# Altium PCB MOCO控制器V1.PcbDoc (part 1 of 2)
Units mm, origin at the board's own origin, x right, y up, seen from the top; angles counter-clockwise.
Board outline 43.94 x 28.83 mm, 4 copper layers (Top Layer, Mid-Layer 1, Mid-Layer 2, Bottom Layer); 67 components, 72 nets, 283 pads, 90 vias.
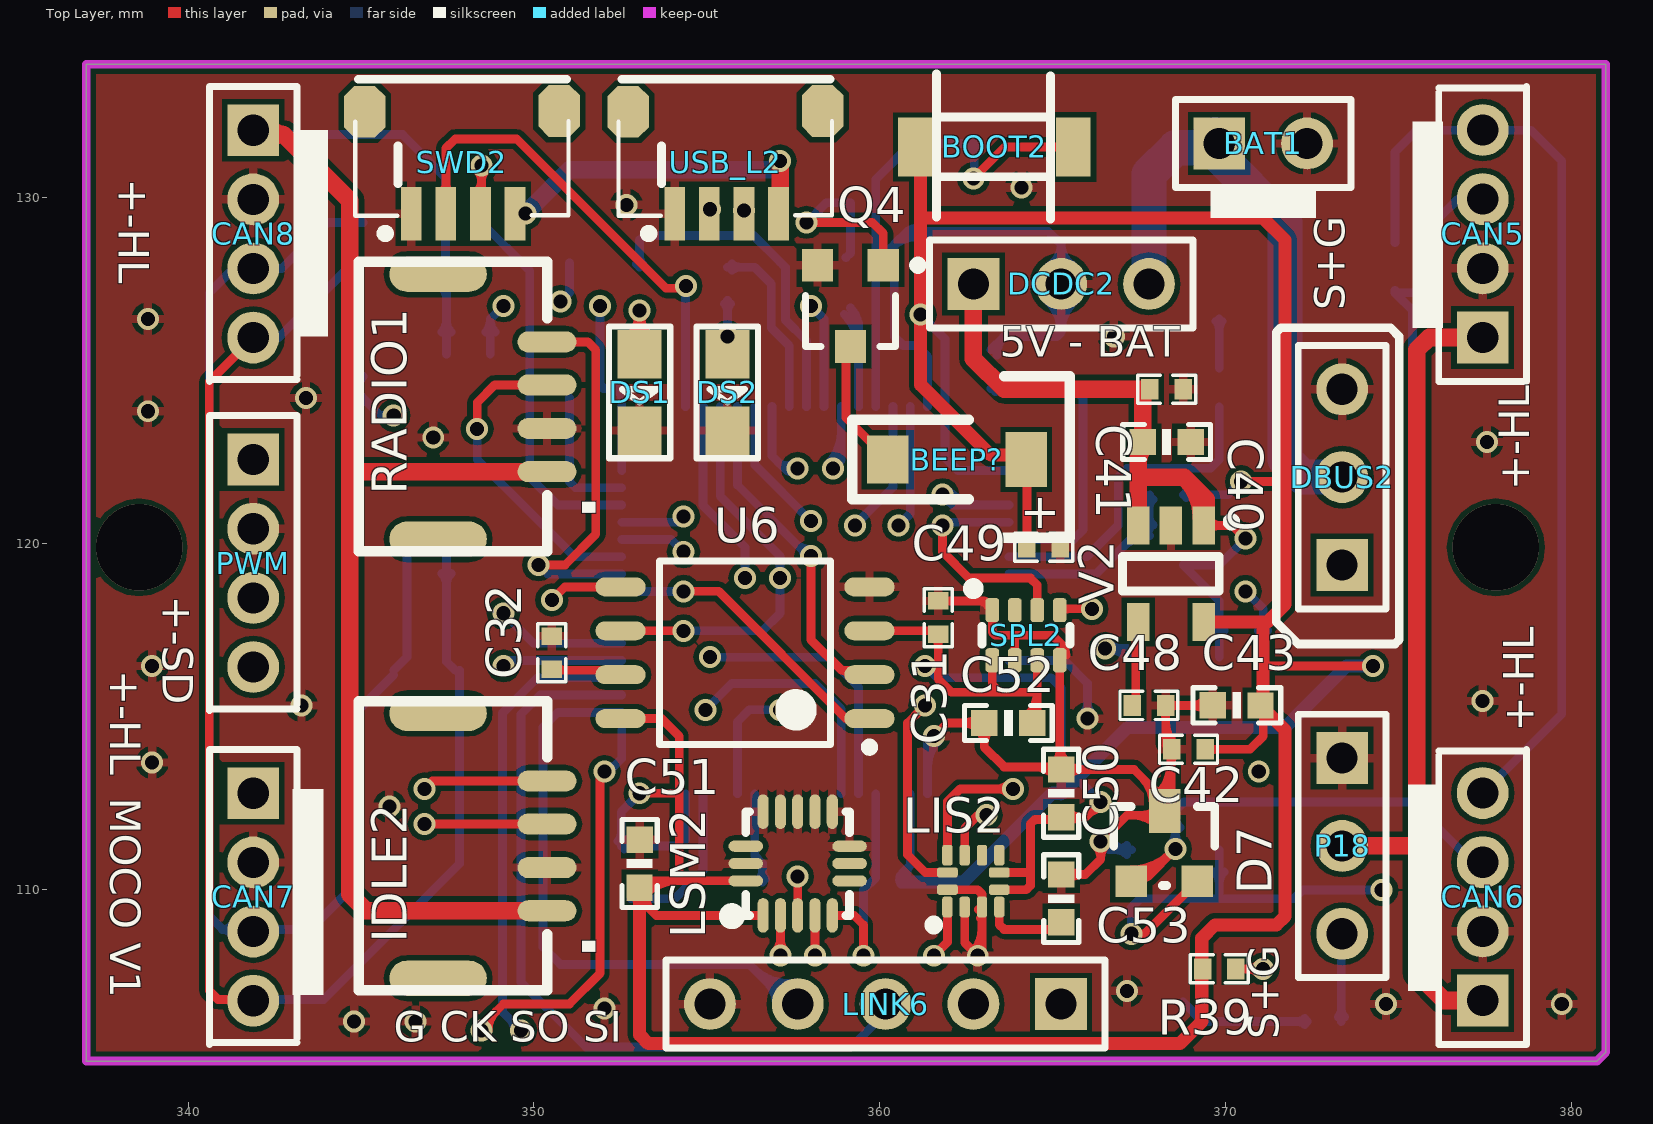
[diagram p0: Top Layer view]
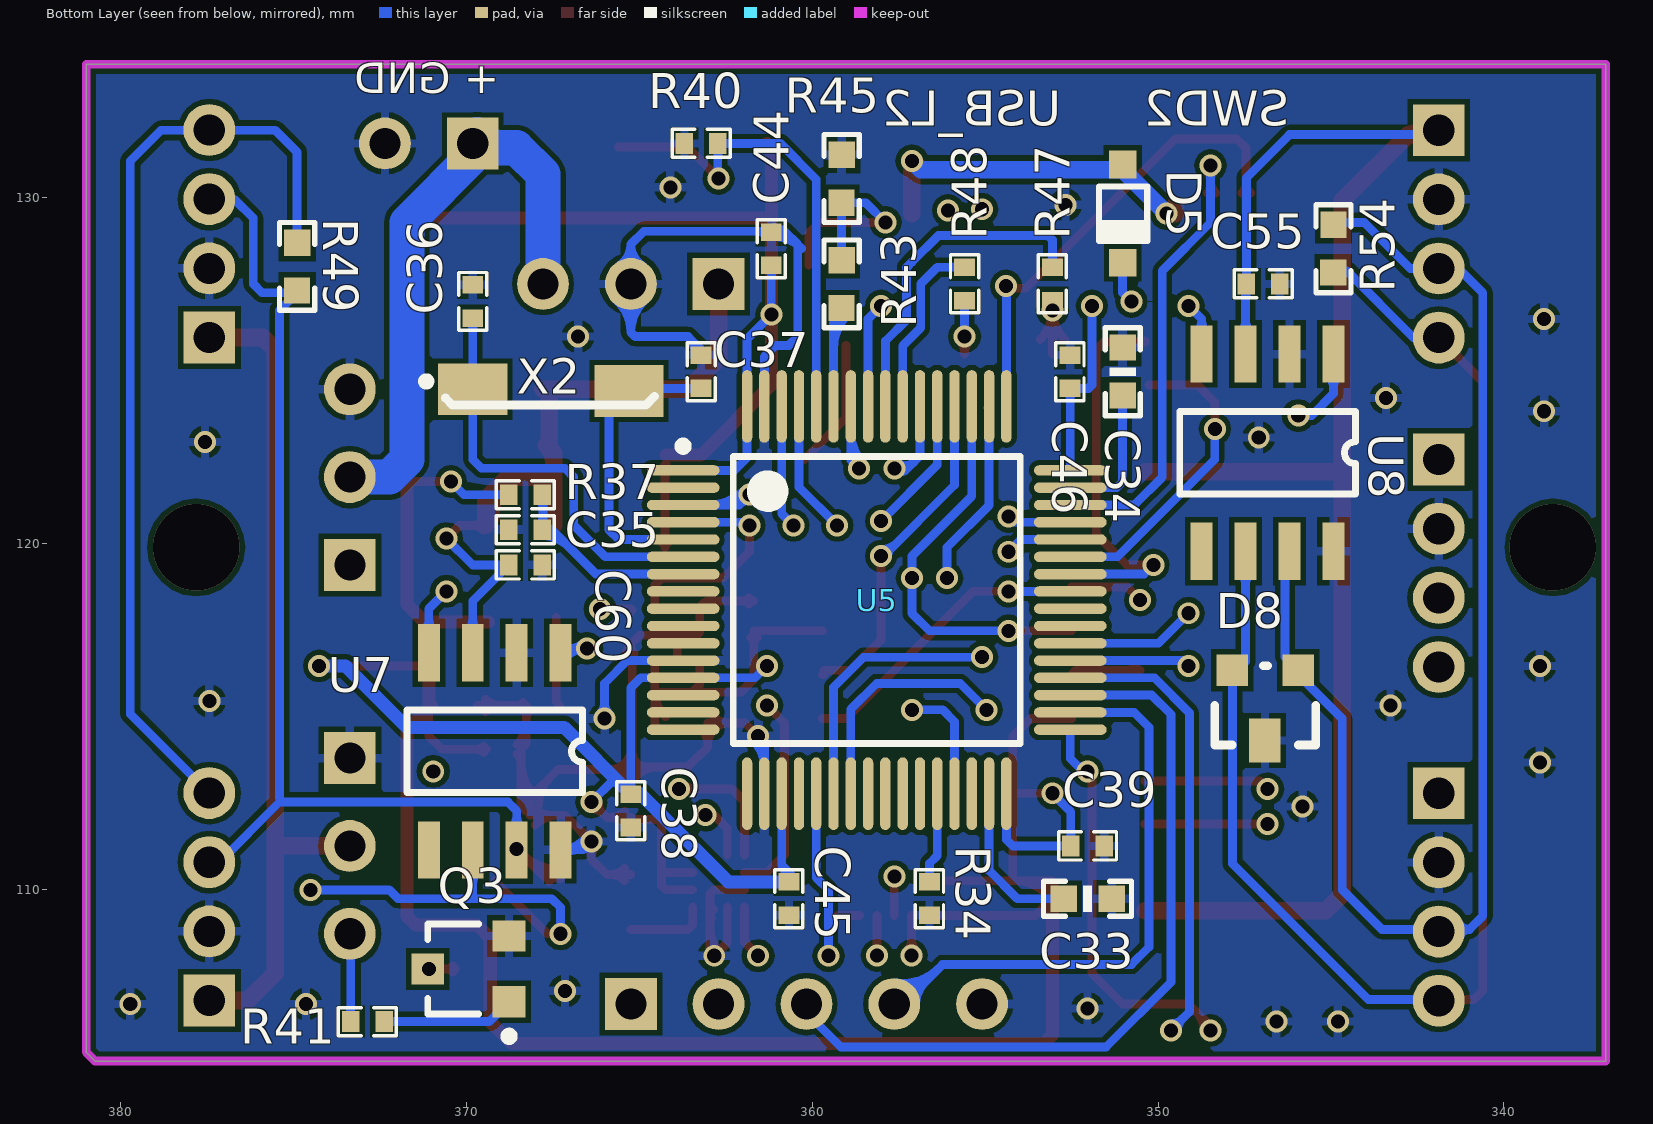
[diagram p1: Bottom Layer view, seen from below]
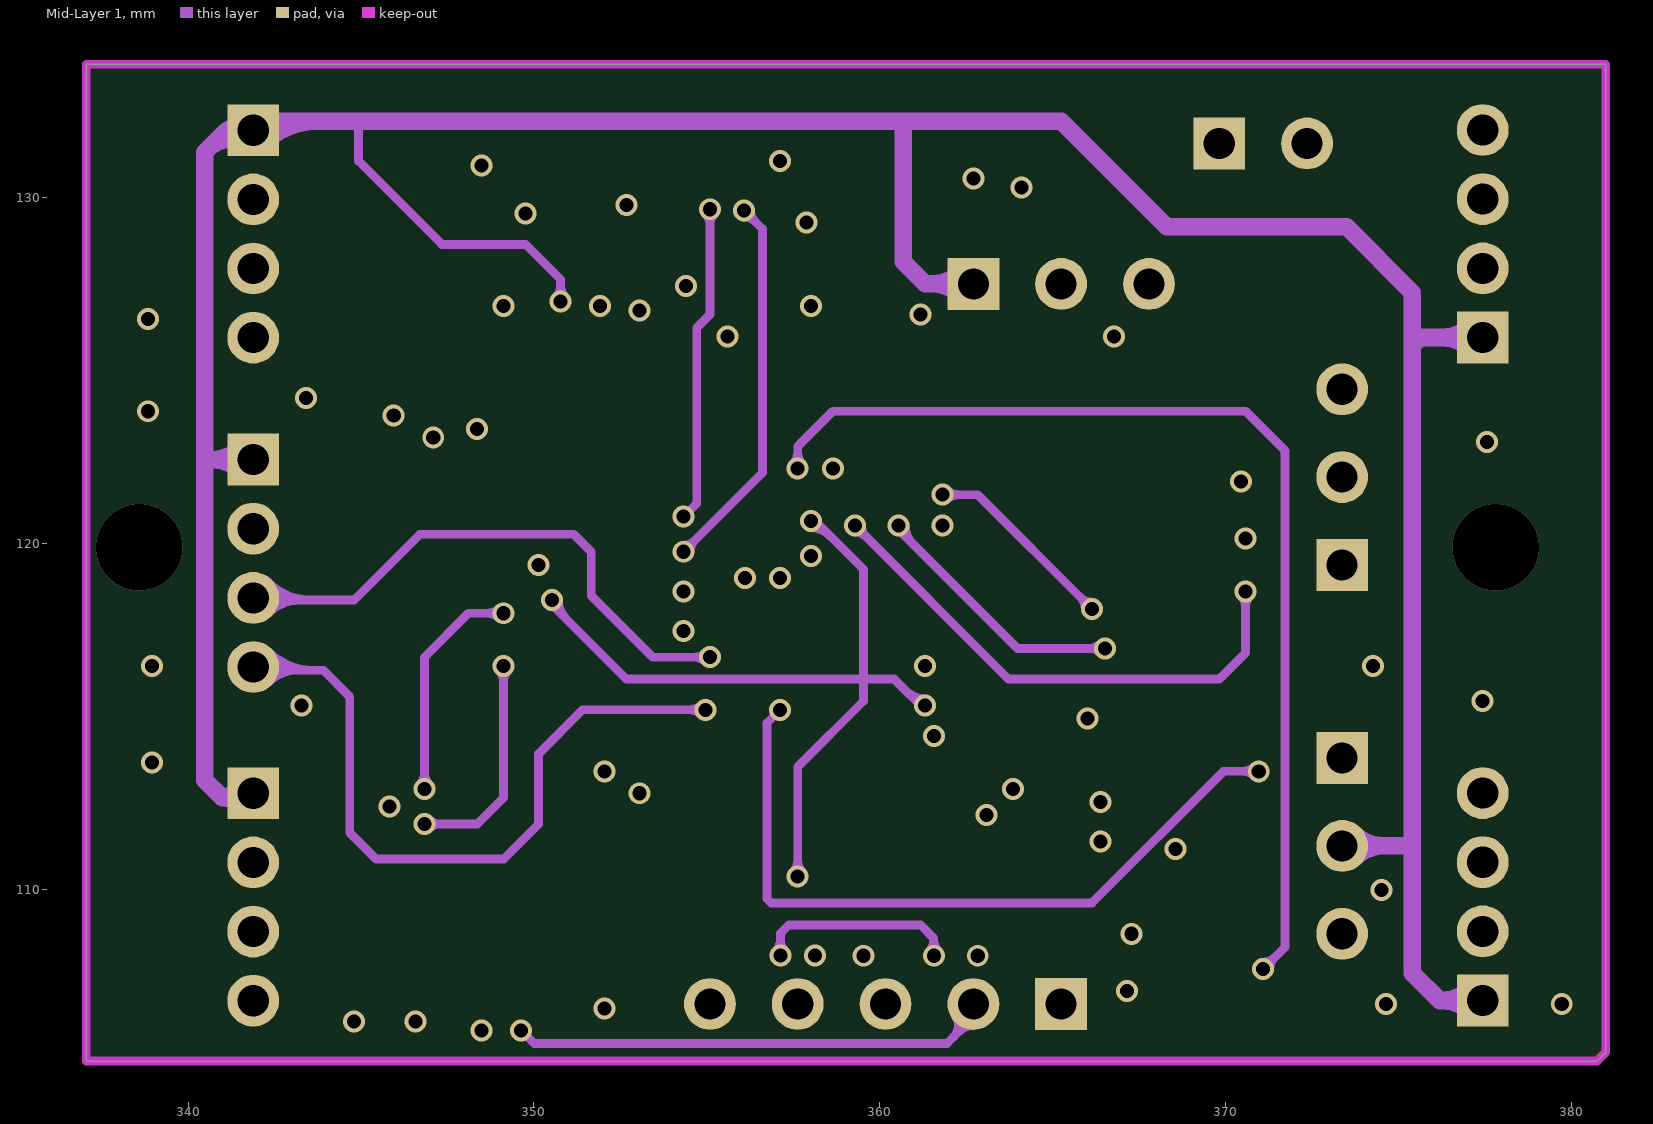
[diagram p2: Mid-Layer 1]
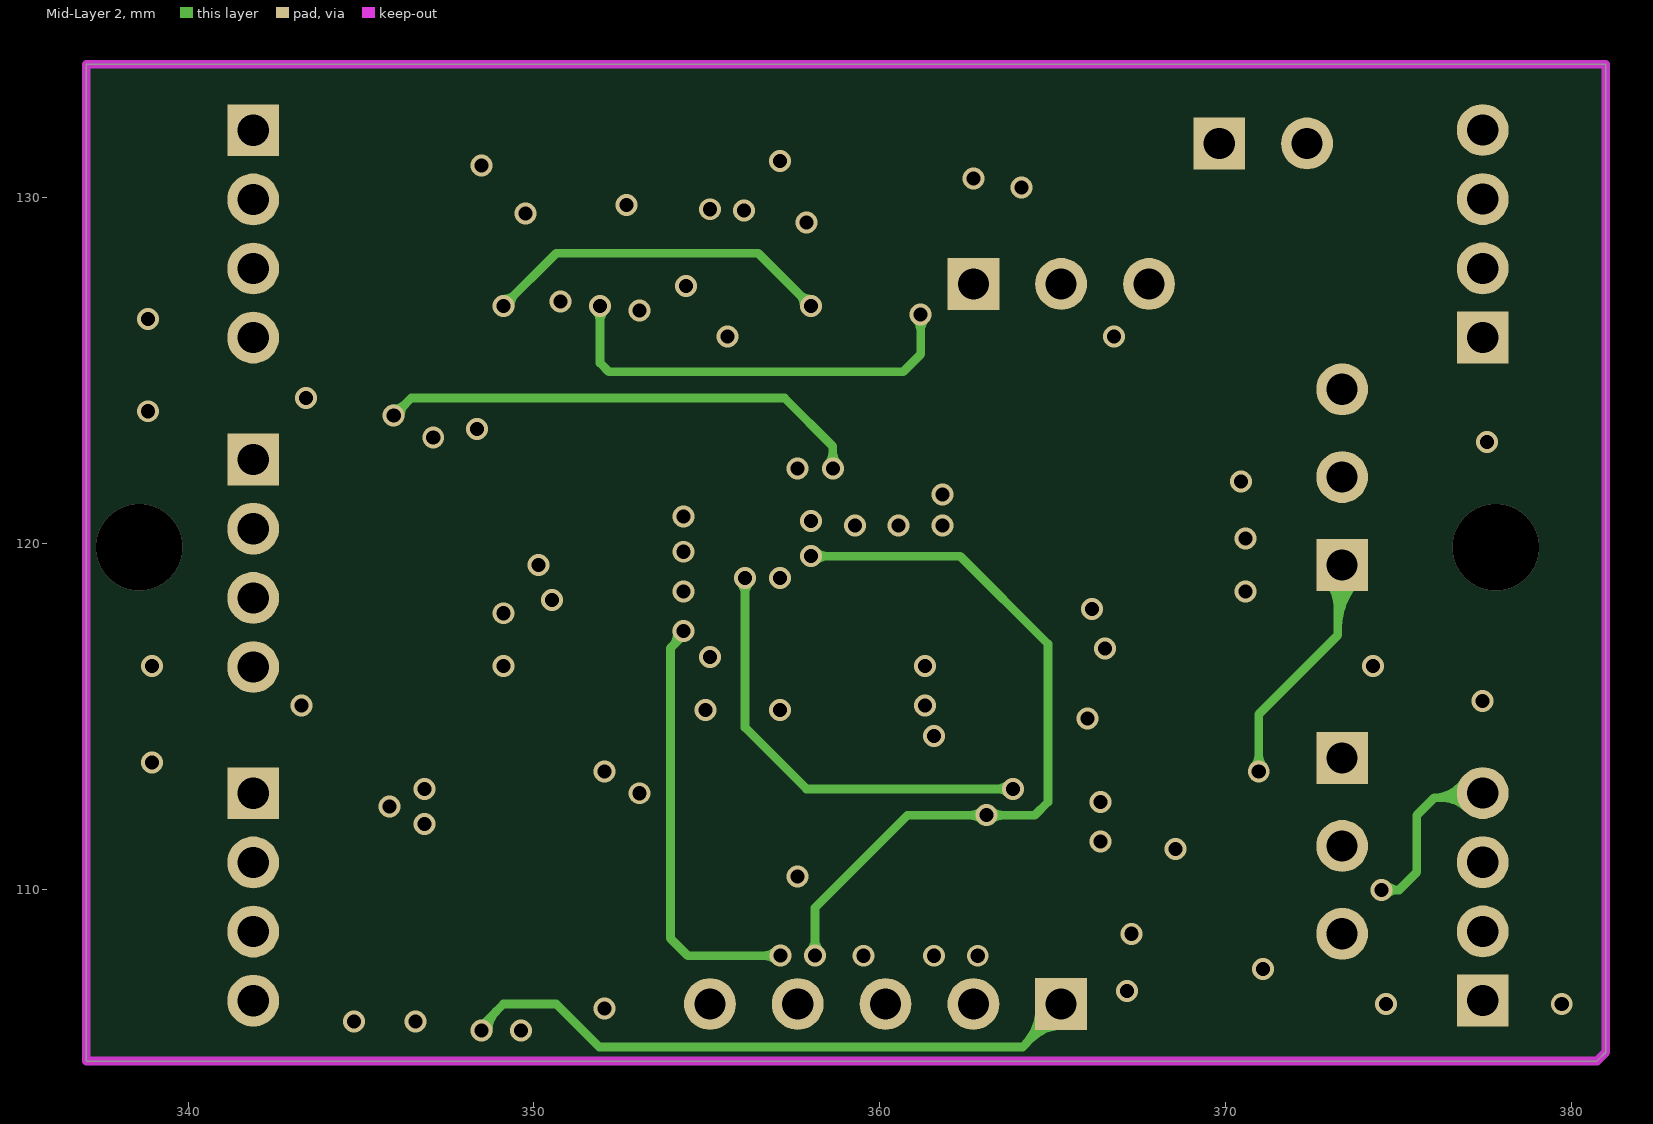
[diagram p3: Mid-Layer 2]
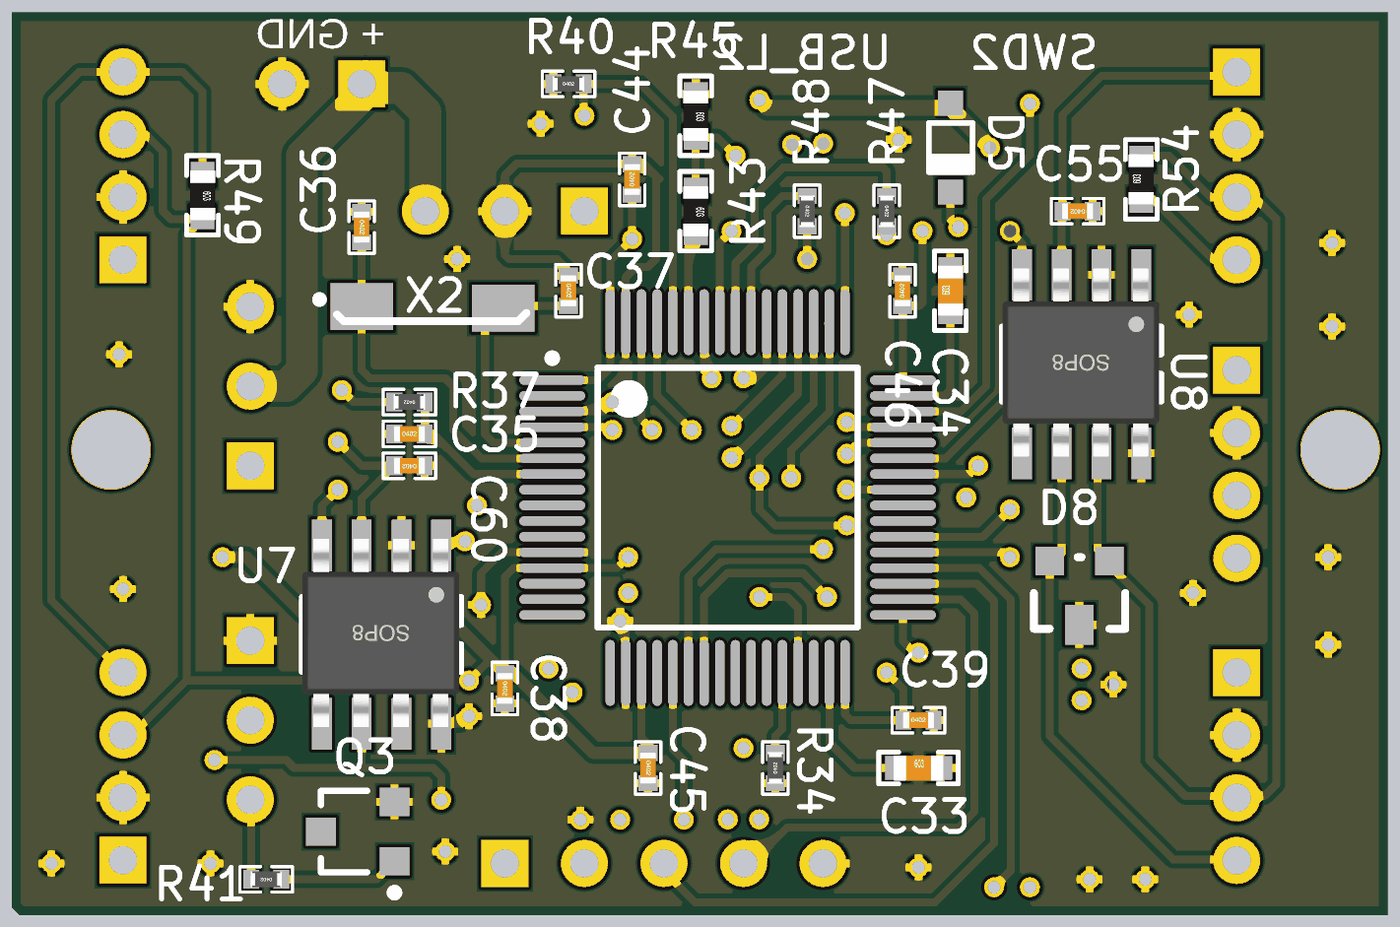
[diagram p5: 3D render of the assembled board from below, using the file's embedded part models]

## Layer stack, top to bottom
Top Layer: signal copper 0.0356
Dielectric: core 0.32, FR-4, Dk 4.8
Mid-Layer 1: signal copper 0.0356
Dielectric: prepreg 0.32, FR-4, Dk 4.8
Mid-Layer 2: signal copper 0.0356
Dielectric: core 0.32, FR-4, Dk 4.8
Bottom Layer: signal copper 0.0356

## Board outline
337.058,105.029 380.746,105.029 381,105.283 381,133.858 337.058,133.858

## Design rules (kind name [scope] priority, off if disabled: settings)
Clearance [All] p1: gap=0.152
PolygonConnect [All] p1: connectstyle=Relief reliefconductorwidth=0.254 reliefentries=4 polygonreliefangle="90 Angle"
RoutingVias [All] p1: holewidth=0.711 width=1.27 viastyle="Through Hole" minholewidth=0.406 minwidth=0.635 maxholewidth=0.711 maxwidth=1.27
SilkscreenOverComponentPads [All] p1: minsilkscreentomaskgap=0.254
SolderMaskExpansion [All] p1: expansion=0.102
Width [All] p1: maxlimit=1.118 minlimit=0.152 preferedwidth=0.254 minimp=50.000000 maximp=50.000000 favimp=50.000000
27 further rules are at their usual default settings.

## Components (designator, comment, footprint, x,y, rotation, side; value= is the part's Value field where it differs from the comment)
BAT1 "Header 2" HDR1X2 369.824,131.572 r0 top
BEEP? "BEEP" DET402 364.236,122.428 r180 top
BOOT2 "Header 2" 663*4*2.0/2.5mm 364.236,131.064 r180 top
C31 "0.1UF" "C 0402" 361.696,117.856 r90 top
C32 "1UF" "C 0402" 350.52,116.84 r270 top
C33 "2.2UF" C0603 352.044,109.728 r180 bottom
C34 "2.2UF" C0603 351.028,124.968 r90 bottom
C35 "10NF" "C 0402" 368.3,120.396 r180 bottom
C36 "20PF" "C 0402" 369.824,127 r270 bottom
C37 "20PF" "C 0402" 363.22,124.968 r270 bottom
C38 "0.1UF" "C 0402" 365.252,112.268 r270 bottom
C39 "0.1UF" "C 0402" 352.044,111.252 r180 bottom
C40 "10uF" C0603 368.3,122.936 r0 top
C41 "0.1uF" "C 0402" 368.3,124.46 r180 top
C42 "0.1uF" "C 0402" 368.935,114.046 r180 top
C43 "10uF" C0603 370.332,115.316 r180 top
C44 "0.1UF" "C 0402" 361.188,128.524 r90 bottom
C45 "0.1UF" "C 0402" 360.68,109.728 r270 bottom
C46 "0.1UF" "C 0402" 352.552,124.968 r90 bottom
C48 "0.1uF" "C 0402" 367.792,115.316 r0 top
C49 "0.1UF" "C 0402" 364.744,119.888 r0 top
C50 "0.1UF" C0603 365.252,112.776 r270 top
C51 "0.1UF" C0603 353.06,110.744 r270 top
C52 "0.1UF" C0603 363.728,114.808 r180 top
C53 "100nF" C0603 365.252,109.728 r90 top
C55 "0.1UF" "C 0402" 346.964,127.508 r0 bottom
C60 "0.1UF" "C 0402" 368.3,119.38 r0 bottom
CAN5 "Header 4" PH2.0-4 377.444,125.959 r90 top
CAN6 "Header 4" PH2.0-4 377.444,106.782 r90 top
CAN7 "Header 4" PH2.0-4 341.884,112.776 r270 top
CAN8 "Header 4" PH2.0-4 341.884,131.953 r270 top
D5 "BAT54WS" SOD-323 351.028,129.54 r90 bottom
D7 "PESD1CAN" SOT-23 367.284,110.236 r0 top
D8 "PESD1CAN" SOT-23 345.948,116.332 r0 bottom
DBUS2 "Header 3" HDR1X3 373.38,119.38 r90 top
DCDC2 "Header 3" HDR1X3 362.712,127.508 r0 top
DS1 "LED1" SMDLED 353.06,125.476 r270 top
DS2 "LED1" SMDLED 355.6,125.476 r270 top
IDLE2 "Header 4" JST_GH_V4 344.932,111.252 r90 top
LINK6 "Header 5" HDR1X5 365.252,106.68 r180 top
LIS2 "LIS3MDL" LIS3MDL 362.712,110.236 r90 top
LSM2 "LSM6DS33" LSM6DS33 357.632,110.744 r90 top
P18 "Header 3" HDR1X3 373.38,113.792 r270 top
PWM "Header 4" PH2.0-4 341.884,122.428 r270 top
Q3 "S8050" SOT-23R 369.824,107.696 r90 bottom
Q4 "S8050" SOT-23R 359.156,127 r180 top
R34 "10K" "R 0402" 356.616,109.728 r90 bottom
R37 "10K" "R 0402" 368.3,121.412 r0 bottom
R39 "10K" "R 0402" 369.824,107.696 r180 top
R40 "10K" "R 0402" 363.22,131.572 r180 bottom
R41 "560R" "R 0402" 372.872,106.172 r0 bottom
R43 "1K" R0603 359.156,127.508 r270 bottom
R45 "10K" R0603 359.156,130.556 r270 bottom
R47 "100R" "R 0402" 353.06,127.508 r270 bottom
R48 "100R" "R 0402" 355.6,127.508 r270 bottom
R49 "120R" R0603 374.904,128.016 r270 bottom
R54 "120R" R0603 344.932,128.524 r90 bottom
RADIO1 "Header 4" JST_GH_V4 344.932,123.952 r90 top
SPL2 "SPL06" SPL06 364.236,117.348 r90 top
SWD2 "Header 4" "SH1.0-4P - up" 346.456,129.54 r0 top
U5 "STM32F405RGT6" LQFP64_M 358.14,118.364 r180 bottom locked
U6 "W25X16" W25Q32FVZPIG 356.108,116.84 r180 top
U7 "TJA1050" SOP-8 367.284,116.84 r270 bottom locked
U8 "TJA1050" SOP-8 344.932,125.476 r270 bottom
USB_L2 "Header 4" "SH1.0-4P - up" 354.076,129.54 r0 top
V2 "RT9193-3.3/LP2985/SPX3819" SOT23-5 368.427,119.126 r90 top
X2 "8MHZ" PXCL 369.824,124.46 r270 bottom

## Footprints (in the part's own frame and the unit in brackets; to place one, negate y for a bottom-side part, rotate by r counter-clockwise, add the part's x,y. Pads: shape width x height; smd on the part's side, far side on the other; paste and mask are expansions set on the pad)
663*4*2.0/2.5mm [mm] "小龟按键"
  rect 1x1.7 smd: 1(3.2,-0.406) 2(-1.372,-0.406)
  silkscreen extent -0.71,-2.51 2.59,1.68
C0603 [mil]
  rect 30x30 smd: 1(-27,0) 2(27.5,-0.06)
  silkscreen extent -50,-20 50,20, body extent -31,-16 31,16, height 12
"C 0402" [mil]
  rect 20x23.62 smd: 1(-19,0) 2(19,0)
  silkscreen extent -33,-16 33,16, body extent -20,-10 20,10, height 20
DET402 [mm]
  rect 1.2x1.6 smd: 1(0,-0.002)
  rect 1.2x1.4 smd: 2(4,0)
  silkscreen extent -1.27,-2.41 5.03,2.26
HDR1X2 [mm] "Connector; Header; 2 Position"
  rect 1.5x1.5 hole 0.9: 1(0,0)
  round 1.5 hole 0.9: 2(2.54,0)
  silkscreen extent -1.27,-1.27 3.81,1.27
HDR1X3 [mm] "Connector; Header; 3 Position"
  rect 1.5x1.5 hole 0.9: 1(0,0)
  round 1.5 hole 0.9: 2(2.54,0) 3(5.08,0)
  silkscreen extent -1.27,-1.27 6.35,1.27
HDR1X5 [mm] "Connector; Header; 5 Position"
  rect 1.5x1.5 hole 0.9: 1(0,0)
  round 1.5 hole 0.9: 2(2.54,0) 3(5.08,0) 4(7.62,0) 5(10.16,0)
  silkscreen extent -1.27,-1.27 11.43,1.27
JST_GH_V4 [mil]
  rrect100% 24x67 smd: 1(-73.82,-214.57) 2(-24.61,-214.57) 3(25,-214.57) 4(74,-214.57)
  rrect100% 40x111 smd: GND(-150.59,-90.55) GND(151,-90.55)
  silkscreen extent -164,-215 165,0, body extent -162,-235 163,-40, height 165
LIS3MDL [mm]
  rrect50% 0.6x0.3 smd: 1(-0.75,0.75) 2(-0.75,0.25) 3(-0.75,-0.25) 4(-0.75,-0.75) 7(0.75,-0.75) 8(0.75,-0.25) 9(0.75,0.25) 10(0.75,0.75)
  rrect50% 0.3x0.6 smd: 5(-0.25,-0.75) 6(0.25,-0.75) 11(0.25,0.75) 12(-0.25,0.75)
  silkscreen extent -1.29,1.12 -1.25,1.16, body extent -1,-1 1,1, height 0.78
LQFP64_M [mm] "Thin QFP, 64-Leads, Body 10x10mm, Pitch 0.5mm, IPC Low Density"
  oval 2.1x0.3 smd: 1(-5.6,3.75) 2(-5.6,3.25) 3(-5.6,2.75) 4(-5.6,2.25) 5(-5.6,1.75) 6(-5.6,1.25) 7(-5.6,0.75) 8(-5.6,0.25) 9(-5.6,-0.25) 10(-5.6,-0.75) 11(-5.6,-1.25) 12(-5.6,-1.75) 13(-5.6,-2.25) 14(-5.6,-2.75) 15(-5.6,-3.25) 16(-5.6,-3.75) 33(5.6,-3.75) 34(5.6,-3.25) 35(5.6,-2.75) 36(5.6,-2.25) 37(5.6,-1.75) 38(5.6,-1.25) 39(5.6,-0.75) 40(5.6,-0.25) 41(5.6,0.25) 42(5.6,0.75) 43(5.6,1.25) 44(5.6,1.75) 45(5.6,2.25) 46(5.6,2.75) 47(5.6,3.25) 48(5.6,3.75)
  oval 0.3x2.1 smd: 17(-3.75,-5.6) 18(-3.25,-5.6) 19(-2.75,-5.6) 20(-2.25,-5.6) 21(-1.75,-5.6) 22(-1.25,-5.6) 23(-0.75,-5.6) 24(-0.25,-5.6) 25(0.25,-5.6) 26(0.75,-5.6) 27(1.25,-5.6) 28(1.75,-5.6) 29(2.25,-5.6) 30(2.75,-5.6) 31(3.25,-5.6) 32(3.75,-5.6) 49(3.75,5.6) 50(3.25,5.6) 51(2.75,5.6) 52(2.25,5.6) 53(1.75,5.6) 54(1.25,5.6) 55(0.75,5.6) 56(0.25,5.6) 57(-0.25,5.6) 58(-0.75,5.6) 59(-1.25,5.6) 60(-1.75,5.6) 61(-2.25,5.6) 62(-2.75,5.6) 63(-3.25,5.6) 64(-3.75,5.6)
  silkscreen extent -5.72,-4.15 4.15,4.57, body extent -5,-5 5,5, height 1.6
LSM6DS33 [mm]
  oval 1x0.32 smd: 1(-1.5,1) 2(-1.5,0.5) 3(-1.5,0) 4(-1.5,-0.5) 5(-1.5,-1) 9(1.5,-1) 10(1.5,-0.5) 11(1.5,0) 12(1.5,0.5) 13(1.5,1)
  oval 0.32x1 smd: 6(-0.5,-1.5) 7(0,-1.5) 8(0.5,-1.5) 14(0.5,1.5) 15(0,1.5) 16(-0.5,1.5)
  silkscreen extent -1.65,-1.5 1.5,2.03, body extent -1.5,-1.5 1.5,1.5, height 0.75
PH2.0-4 [mm]
  rect 1.5x1.5 hole 0.9: 1(0,0)
  round 1.5 hole 0.9: 2(2,0) 3(4,0) 4(6,0)
  silkscreen extent -1.27,-1.27 7.26,1.27
PXCL [mm]
  rect 1.5x2 smd: 1(0,0) 2(0.051,4.521)
  silkscreen extent -0.34,-1.45 0.46,5.26
R0603 [mil]
  rect 30x30 smd: 1(-27,0) 2(27.5,-0.06)
  silkscreen extent -50,-20 50,20, body extent -31,-16 31,16, height 12
"R 0402" [mil]
  rect 20x23.62 smd: 1(-19,0) 2(19,0)
  silkscreen extent -33,-16 33,16, body extent -20,-10 20,10, height 12
"SH1.0-4P - up" [mm]
  rect 0.6x1.55 smd: 1(0,0) 2(1,0) 3(2,0) 4(3,0)
  oct 1.2x1.5 smd: 1.(4.279,2.972) A(-1.346,2.946)
  silkscreen extent -1.63,-0.7 4.55,3.89
SMDLED [mm]
  rect 1.4x1.27 smd: 1(0.001,-0.002) 2(2.211,-0.002)
  silkscreen extent -0.8,-0.89 3.01,0.89
SOD-323 [mm]
  rect 0.8x0.8 smd: 1(1.422,0) 2(-1.422,0)
  silkscreen extent -0.79,-0.74 0.79,0.69
SOP-8 [mil]
  rect 65x25 smd: 1(0,0) 2(0,-50) 3(0,-100) 4(0,-150) 5(224.41,-150) 6(224.41,-100) 7(224.41,-50) 8(224.41,0)
  silkscreen extent 65,-175 159,25, body extent -8,-174 228,23, height 75
SOT23-5 [mm]
  rect 1.1x0.65 smd: 1(1.4,-0.95) 2(1.4,0) 3(1.4,0.95) 4(-1.4,0.95) 5(-1.4,-0.95)
  silkscreen extent -0.5,-1.88 1.62,1.4, body extent -1.28,-1.5 1.22,1.5, height 1.05
SOT-23 [mil]
  rect 36x36 smd: 1(0,0) 2(75,0)
  rect 36x50 smd: 3(38,80)
  silkscreen extent -20,-5 95,85
SOT-23R [mm]
  rect 0.9x0.95 smd: 1(0.95,-1.048) 2(-0.95,-1.048) 3(0,1.302)
  silkscreen extent -2.07,-1.17 1.3,1.3
SPL06 [mm]
  rrect50% 0.7x0.4 smd: 1(0.725,0.975) 2(0.725,0.325) 3(0.725,-0.325) 4(0.725,-0.975) 5(-0.725,-0.975) 6(-0.725,-0.325) 7(-0.725,0.325) 8(-0.725,0.975)
  silkscreen extent -0.25,-1.27 1.4,1.57, body extent -1,-1.25 1,1.25, height 0.95
W25Q32FVZPIG [mm] "SOP, 8-Leads, Body 5.3x5.3mm (max), Pitch 1.27mm, IPC Medium Density"
  oval 1.45x0.55 smd: 1(-3.6,1.905) 2(-3.6,0.635) 3(-3.6,-0.635) 4(-3.6,-1.905) 5(3.6,-1.905) 6(3.6,-0.635) 7(3.6,0.635) 8(3.6,1.905)
  silkscreen extent -3.73,-2.65 2.47,2.85, body extent -2.64,-2.64 2.64,2.64, height 2.65

## Part data
BAT1 BOOT2: "Header, 2-Pin"
C31 C32 C35 C38 C39 C40 C42 C43 C44 C45 C46 C49 C50 C51 C52 C53 C55 C60: library part CAP, "Capacitor"
C33 C34: library part CAP1, "胆电容"
C36 C37: library part C2, "0805"
C41 C48: library part Capacitor, "普通电容"
CAN5 CAN6 CAN7 CAN8 IDLE2 PWM RADIO1 SWD2 USB_L2: "Header, 4-Pin"
D5: library part BAT54, "单肖特基二极管"
DBUS2 DCDC2 P18: "Header, 3-Pin"
DS1 DS2: library part LED2, "Typical RED, GREEN, YELLOW, AMBER GaAs LED"
LINK6: "Header, 5-Pin"
Q3 Q4: library part NPN, "8050/BCW846/BCW847"
R34 R37 R39 R40 R41 R43 R45 R47 R48 R49 R54: library part Res2, "0603"
U6: "W25X16;SST25VF016;MX25L1605"
U7 U8: library part SN65HVD230D
V2: "降压IC"
X2: library part XTAL, "Crystal Oscillator"

## Via types
v1: diameter 0.635, hole 0.406, Top Layer to Bottom Layer, 88 vias
v2: diameter 2.5, hole 2.5, Top Layer to Bottom Layer, 2 vias

## Nets (pads, with @x,y where several pads share a name; then routed paths per layer and width w, separated by ;. In a path a pad name is that pad's centre, name@x,y a point inside that pad or via, vN(x,y) a via of type N, cw(c..) or ccw(c..) an arc to the next point about the centre after c; other vN are vias at no path point)
3.3V: BEEP?.1 BOOT2.1 C31.1 C38.1 C39.1 C42.1 C43.1 C44.1 C45.1 C46.1 C49.1 C50.2 C51.2 C52.1 LIS2.5 LIS2.6 LSM2.1 LSM2.16 R37.2 R39.2 SPL2.6 SPL2.8 U5.1 U5.13 U5.19 U5.32 U5.48 U5.64 U6.3 U6.8 V2.5 | length 182.3
  Top Layer w0.254: U6.8@352.508,114.935 353.695,114.935 354.203,114.427 354.203,112.776 ; C51.2@353.06,110.236 353.068,110.244 354.203,110.244 ; v1(353.06,112.776) 354.203,112.776 ; 353.128,109.66 cw(c353.37,109.903) C51.2@353.058,110.045 ; C51.2@353.238,109.866 cw(c354.151,108.953) 354.151,110.244 ; C51.2@353.289,109.94 ccw(c353.725,109.74) 353.386,109.402 ; 353.538,110.244 ccw(c353.538,109.566) C51.2@353.058,110.045 ; LSM2.16@356.132,110.244 354.203,110.244 ; LSM2.1@356.632,109.244 353.544,109.244 353.058,109.73 C51.2@353.058,110.045 ; U6.3@359.708,117.475 C31.1@361.696,117.475 ; v1(361.315,116.459) 361.569,116.459 361.696,116.586 ; C31.1@361.606,117.284 cw(c361.389,117.067) 361.696,117.067 cw(c362.003,117.067) C31.1@361.786,117.284 ; C31.1@361.696,117.373 361.696,116.586 ; SPL2.8@363.261,116.623 363.261,115.91 363.474,115.697 ; LIS2.5@363.462,109.986 364.24,109.986 364.363,110.109 364.363,110.49 ; LIS2.6@363.462,110.486 364.359,110.486 364.363,110.49 ; C49.1@364.172,120.024 ccw(c363.955,120.241) 364.261,120.241 ccw(c364.568,120.241) C49.1@364.351,120.024 ; BEEP?.1@364.236,122.301 364.261,122.276 C49.1@364.261,119.888 ; C52.1@364.246,114.998 ccw(c363.63,115.697) 364.561,115.697 ; C52.1@364.49,114.681 364.561,114.752 364.561,115.697 ; SPL2.6@364.561,116.623 364.561,115.697 ; C50.2@365.25,112.078 365.95,112.078 v1(366.395,112.522) ; C50.2@365.379,112.014 364.49,112.014 364.363,111.887 364.363,110.49 ; C50.2@365.43,111.898 cw(c365.864,111.464) 365.864,112.078 cw(c365.864,112.691) C50.2@365.43,112.257 ; v1@366.204,112.522 cw(c365.745,112.522) 366.07,112.197 cw(c366.395,111.872) v1@366.395,112.331 ; C42.1@369.418,114.046 370.713,114.046 371.094,114.427 371.094,115.24 371.094,115.316 C43.1@371.018,115.316 C43.1@370.967,115.316 ; C42.1@369.507,113.956 cw(c369.724,113.739) 369.724,114.046 cw(c369.724,114.353) C42.1@369.507,114.136 ; v1(370.459,121.793) 371.729,121.793 ; 371.094,116.459 v1(374.269,116.459) ; 354.203,110.244 354.203,112.776 ; 361.696,116.586 361.696,116.078 362.077,115.697 363.474,115.697 ; 363.474,115.697 364.561,115.697
  Top Layer w0.381: C51.2@352.924,109.911 cw(c352.598,109.586) 353.058,109.586 cw(c353.518,109.586) C51.2@353.193,109.911 ; C51.2@353.058,110.045 353.058,105.793 353.314,105.537 368.681,105.537 369.316,106.172 369.316,108.585 369.697,108.966 371.475,108.966 371.729,109.22 371.729,114.605 371.094,115.24 C43.1@371.018,115.316 ; BOOT2.1@361.315,131.572 361.188,131.445 361.188,129.413 ; BEEP?.1@364.236,122.555 363.22,122.555 361.188,124.587 v1(361.188,126.619) 361.188,129.413 ; 370.462,117.726 V2.5@369.377,117.726 371.094,117.726 371.094,116.459 C43.1@371.094,115.316 ; 371.218,117.726 371.729,118.237 371.729,121.793 371.729,128.778 371.094,129.413 361.188,129.413
  Mid-Layer 2 w0.254: v1@351.782,126.738 cw(c351.457,126.413) 351.917,126.413 cw(c352.377,126.413) v1@352.052,126.738 ; v1(351.917,126.873) 351.917,125.222 352.171,124.968 360.68,124.968 361.188,125.476 v1(361.188,126.619) ; v1@361.053,126.484 cw(c360.728,126.159) 361.188,126.159 cw(c361.648,126.159) v1@361.323,126.484
  Bottom Layer w0.254: v1(351.917,126.873) 351.917,124.587 352.019,124.485 C46.1@352.552,124.485 ; C46.1@352.416,124.396 ccw(c352.199,124.179) 352.199,124.485 ccw(c352.199,124.792) C46.1@352.416,124.575 ; C39.1@352.437,111.388 ccw(c352.22,111.605) 352.527,111.605 ccw(c352.833,111.605) C39.1@352.616,111.388 ; C46.1@352.462,124.396 cw(c352.274,124.208) 352.54,124.208 ; U5.48@352.54,122.114 352.54,124.448 C46.1@352.552,124.46 ; 352.54,124.15 cw(c352.888,124.15) C46.1@352.642,124.396 ; C39.1@352.616,111.162 cw(c352.833,110.945) 352.833,111.252 cw(c352.833,111.559) C39.1@352.616,111.342 ; v1(353.06,112.776) 352.527,112.243 C39.1@352.527,111.252 354.203,111.252 354.39,111.439 U5.32@354.39,112.764 ; C45.1@360.616,110.146 cw(c360.845,110.28) 360.658,110.468 ; C45.1@360.68,110.363 360.68,110.49 360.89,110.7 ; C45.1@360.836,110.275 cw(c361.138,110.452) 360.89,110.7 ; U5.19@360.89,112.764 360.89,110.7 ; C44.1@361.098,127.952 cw(c360.881,127.735) 361.188,127.735 cw(c361.495,127.735) C44.1@361.278,127.952 ; C44.1@361.188,128.016 v1(361.188,126.619) 361.89,125.917 U5.64@361.89,123.964 361.89,122.488 362.264,122.114 U5.1@363.74,122.114 ; v1(361.315,116.459) 361.66,116.114 U5.13@363.74,116.114 364.962,116.114 365.252,115.824 C38.1@365.252,112.903 ; C38.1@365.162,112.84 ccw(c364.945,113.057) 365.252,113.057 ccw(c365.559,113.057) C38.1@365.342,112.84 ; 365.76,113.157 v1(366.395,112.522) ; R37.2@368.783,121.412 370.078,121.412 v1(370.459,121.793) ; R37.2@368.872,121.322 cw(c369.089,121.105) 369.089,121.412 cw(c369.089,121.719) R37.2@368.872,121.502
  Bottom Layer w0.381: C45.1@360.68,110.211 362.433,110.211 364.998,112.776 C38.1@365.252,112.776 ; C44.1@361.188,128.016 C44.1@361.188,128.041 ; C38.1@365.252,112.751 367.182,114.681 371.729,114.681 373.507,116.459 v1(374.269,116.459)
5V: C40.1 C41.2 C55.2 C60.2 CAN5.1 CAN6.1 CAN7.1 CAN8.1 D5.2 DCDC2.1 IDLE2.1 P18.2 PWM.1 RADIO1.1 U7.3 U8.3 V2.1 V2.3 | length 217.3
  Top Layer w0.254: V2.1@369.377,120.526 369.443,120.592 V2.1@369.57,120.719 ; V2.1@369.443,120.523 370.205,120.523 v1(370.586,120.142) ; V2.1@369.517,120.386 cw(c369.848,120.055) 369.848,120.523 ; V2.1@369.517,120.666 ccw(c369.862,121.011) 369.862,120.523
  Top Layer w0.508: CAN8.1@342.011,131.826 342.773,131.826 ; CAN8.1@342.235,131.603 cw(c342.773,131.067) 342.773,131.826 ; CAN8.1@342.35,132.122 ccw(c342.773,132.276) 342.773,131.826 ; IDLE2.1@350.382,109.377 345.156,109.377 344.678,109.855 344.678,122.174 ; RADIO1.1@350.382,122.077 344.775,122.077 344.678,122.174 ; DCDC2.1@362.712,127.508 362.712,125.349 363.601,124.46 367.538,124.46 ; V2.3@367.477,120.526 367.477,121.92 ; 367.477,122.298 cw(c368.252,122.298) C40.1@367.704,122.846 ; C40.1@367.614,122.936 367.614,124.384 367.538,124.46 ; C40.1@367.665,122.809 367.477,122.621 367.477,121.92 ; C41.2@367.792,124.46 367.538,124.46 ; 368.832,121.896 cw(c367.686,120.751) V2.1@369.306,120.751 ; V2.1@369.327,120.801 ccw(c369.046,121.082) 369.443,121.082 ; V2.1@369.443,120.523 369.443,120.592 369.443,121.285 368.808,121.92 367.477,121.92 ; P18.2@373.38,111.252 375.412,111.252 375.539,111.125 ; CAN6.1@377.444,106.782 376.326,106.782 375.539,107.569 375.539,111.125 ; CAN5.1@377.444,125.959 375.895,125.959 375.539,125.603 375.539,111.125 ; 342.773,131.826 344.678,129.921 344.678,122.174
  Mid-Layer 1 w0.254: 344.932,132.207 344.932,131.064 347.345,128.651 349.758,128.651 350.774,127.635 v1(350.774,127) ; v1@350.639,127.135 ccw(c350.314,127.46) 350.774,127.46 ccw(c351.234,127.46) v1@350.909,127.135
  Mid-Layer 1 w0.508: 340.614,131.445 cw(c341.169,130.89) CAN8.1@341.607,131.541 ; 340.792,131.623 cw(c341.665,130.749) CAN8.1@341.886,131.965 ; 341.05,131.881 cw(c341.52,131.412) CAN8.1@341.891,131.963 ; CAN7.1@341.418,112.945 cw(c340.995,113.099) 340.995,112.649 ; CAN8.1@341.418,132.122 cw(c340.995,132.276) 340.995,131.826 ; CAN7.1@341.533,112.426 ccw(c340.995,111.89) 340.995,112.649 ; CAN8.1@341.533,131.603 ccw(c340.995,131.067) 340.995,131.826 ; PWM.1@341.533,122.077 ccw(c340.687,121.231) 340.687,122.428 ccw(c340.687,123.625) PWM.1@341.533,122.779 ; CAN8.1@341.757,131.953 342.011,132.207 344.932,132.207 360.68,132.207 ; CAN7.1@341.884,112.649 340.995,112.649 ; PWM.1@341.884,122.428 340.487,122.428 ; CAN8.1@341.884,131.826 340.995,131.826 ; CAN8.1@342.235,131.602 cw(c343.695,130.142) 343.695,132.207 ; DCDC2.1@362.361,127.157 ccw(c361.515,126.311) 361.515,127.508 ccw(c361.515,128.705) DCDC2.1@362.361,127.859 ; DCDC2.1@362.712,127.508 361.315,127.508 360.68,128.143 360.68,132.207 ; P18.2@373.38,111.252 375.412,111.252 ; P18.2@373.731,110.901 cw(c374.577,110.055) 374.577,111.252 cw(c374.577,112.449) P18.2@373.731,111.603 ; 375.539,125.857 375.641,125.959 CAN5.1@377.444,125.959 ; CAN6.1@377.093,106.431 ccw(c376.247,105.584) 376.247,106.782 ccw(c376.247,107.979) CAN6.1@377.093,107.132 ; CAN5.1@377.093,125.608 ccw(c376.247,124.761) 376.247,125.959 ccw(c376.247,127.156) CAN5.1@377.093,126.309 ; CAN6.1@377.444,106.782 376.199,106.782 375.412,107.569 375.412,111.252 ; 340.487,122.428 340.487,131.318 340.995,131.826 ; 340.487,122.428 340.487,113.157 340.995,112.649 ; 360.68,132.207 365.252,132.207 368.3,129.159 373.507,129.159 375.412,127.254 375.412,111.252
  Bottom Layer w0.254: CAN8.1@342.011,131.826 346.202,131.826 347.447,130.581 C55.2@347.447,127.508 ; U8.3@347.337,126.119 ccw(c347.012,126.444) 347.472,126.444 ccw(c347.932,126.444) U8.3@347.607,126.119 ; C55.2@347.357,127.372 cw(c347.079,127.094) 347.472,127.094 ; C55.2@347.357,127.644 ccw(c347.14,127.861) 347.447,127.861 ccw(c347.753,127.861) C55.2@347.536,127.644 ; U8.3@347.472,125.476 C55.2@347.472,127.508 ; v1(350.774,127) 351.028,127.254 D5.2@351.028,128.118 ; C60.2@368.872,119.29 cw(c369.089,119.073) 369.089,119.38 cw(c369.089,119.687) C60.2@368.872,119.47 ; U7.3@369.689,117.483 ccw(c369.364,117.808) 369.824,117.808 ccw(c370.284,117.808) U7.3@369.959,117.483 ; U7.3@369.824,116.713 U7.3@369.824,116.84 369.824,118.339 C60.2@368.783,119.38 369.824,119.38 v1(370.586,120.142)
BAT: U5.20
BEEP: R43.2 U5.59 | length 4.5
  Bottom Layer w0.254: R43.2@358.978,126.63 cw(c357.983,125.635) 359.39,125.635 ; R43.2@359.156,126.619 359.39,126.385 U5.59@359.39,123.964 ; R43.2@359.158,126.809 cw(c358.597,126.248) 359.39,126.248
CAN_RX1: U5.61 U7.4 | length 23.4
  Mid-Layer 1 w0.254: v1@359.283,120.332 cw(c359.283,119.873) 359.608,120.198 cw(c359.933,120.523) v1@359.474,120.523 ; v1(359.283,120.523) 363.728,116.078 369.824,116.078 370.586,116.84 v1(370.586,118.618) v1@370.586,118.745 ; v1@370.451,118.483 cw(c370.126,118.158) 370.586,118.158 cw(c371.046,118.158) v1@370.721,118.483
  Bottom Layer w0.254: v1(359.283,120.523) 360.39,121.63 U5.61@360.39,123.964 ; v1(370.586,118.618) 371.094,118.11 U7.4@371.094,116.84 ; U7.4@370.959,117.483 ccw(c370.634,117.808) 371.094,117.808 ccw(c371.554,117.808) U7.4@371.229,117.483
CAN_RX2: U5.57 U8.4 | length 18.6
  Mid-Layer 2 w0.254: v1(349.123,126.873) 350.647,128.397 356.489,128.397 v1(358.013,126.873) ; v1@349.123,127.063 ccw(c349.123,127.523) 349.448,127.198 ccw(c349.773,126.873) v1@349.313,126.873 ; v1@357.822,126.873 ccw(c357.363,126.873) 357.688,127.198 ccw(c358.013,127.523) v1@358.013,127.063
  Bottom Layer w0.254: U8.4@348.607,126.119 ccw(c348.282,126.444) 348.742,126.444 ccw(c349.202,126.444) U8.4@348.877,126.119 ; U8.4@348.742,125.476 348.742,126.492 v1(349.123,126.873) ; v1(358.013,126.873) 358.39,126.496 U5.57@358.39,123.964 358.39,125.607
CAN_TX1: U5.62 U7.1 | length 14.7
  Mid-Layer 1 w0.254: v1@360.426,120.523 363.982,116.967 v1(366.522,116.967) ; v1@360.743,120.523 ccw(c361.51,120.523) 360.968,119.981 ; v1@366.387,116.832 ccw(c366.062,116.507) 366.062,116.967 ccw(c366.062,117.427) v1@366.387,117.102
  Bottom Layer w0.254: v1(360.553,120.523) 360.89,120.86 U5.62@360.89,123.964 ; v1@366.657,116.832 cw(c366.982,116.507) 366.982,116.967 cw(c366.982,117.427) v1@366.657,117.102 ; U7.1@367.149,116.706 ccw(c366.522,116.084) v1(366.522,116.967) 367.157,116.967 U7.1@367.284,116.84
CAN_TX2: U5.58 U8.1 | length 21.9
  Mid-Layer 2 w0.254: v1(345.948,123.698) 346.456,124.206 357.251,124.206 358.648,122.809 v1(358.648,122.174) v1@358.648,122.047 ; v1@345.948,123.888 ccw(c345.948,124.348) 346.273,124.023 ccw(c346.598,123.698) v1@346.138,123.698 ; v1@358.513,122.309 ccw(c358.188,122.634) 358.648,122.634 ccw(c359.108,122.634) v1@358.783,122.309
  Bottom Layer w0.254: U8.1@344.797,124.833 cw(c344.472,124.508) 344.932,124.508 cw(c345.392,124.508) U8.1@345.067,124.833 ; U8.1@344.932,125.476 344.932,124.333 345.567,123.698 v1(345.948,123.698) ; v1@358.513,122.309 ccw(c357.604,123.218) U5.58@358.89,123.218 ; v1@358.693,122.129 ccw(c358.217,122.605) 358.89,122.605 ; 358.89,122.416 U5.58@358.89,123.964
CS_BARO: LINK6.1 U5.33 | length 33.9
  Top Layer w0.254: v1@348.361,105.918 349.123,106.68 351.028,106.68 351.917,107.569 351.917,112.268 351.917,113.284 v1(352.044,113.411) ; v1@348.678,105.918 cw(c349.445,105.918) 348.903,106.46
  Mid-Layer 2 w0.254: v1(348.488,105.918) 348.488,106.045 349.123,106.68 350.647,106.68 351.892,105.435 364.134,105.435 LINK6.1@365.252,106.553 ; v1@348.678,105.918 cw(c349.445,105.918) 348.903,106.46 ; 364.198,105.499 ccw(c363.148,106.549) LINK6.1@364.63,106.641 ; 364.405,105.706 cw(c365.252,104.86) LINK6.1@365.252,106.057 ; 364.596,105.897 ccw(c363.897,106.596) LINK6.1@364.884,106.657
  Bottom Layer w0.254: v1@352.171,113.411 352.54,113.78 U5.33@352.54,114.614
CS_FLASH: U5.41 U6.1 | length 8.7
  Top Layer w0.254: v1(354.33,118.618) 355.346,118.618 359.029,114.935 U6.1@359.708,114.935
  Bottom Layer w0.254: U5.41@352.54,118.614 354.326,118.614 v1(354.33,118.618)
CS_HML: LIS2.10 U5.50 | length 25.5
  Top Layer w0.254: 361.962,112.407 LIS2.10@361.962,110.986 361.962,112.534 362.331,112.903 v1(363.855,112.903) ; v1@363.72,112.768 ccw(c363.395,112.443) 363.395,112.903 ccw(c363.395,113.363) v1@363.72,113.038
  Mid-Layer 2 w0.254: v1@355.973,118.864 cw(c355.648,118.539) 356.108,118.539 cw(c356.568,118.539) v1@356.243,118.864 ; v1(356.108,118.999) 356.108,114.681 357.886,112.903 v1(363.855,112.903) ; v1@363.72,112.768 ccw(c363.395,112.443) 363.395,112.903 ccw(c363.395,113.363) v1@363.72,113.038
  Bottom Layer w0.254: U5.50@354.927,123.927 U5.50@354.89,123.964 354.89,121.106 356.108,119.888 v1(356.108,118.999)
CS_IMU: LSM2.5 U5.21 | length 6.6
  Top Layer w0.254: LSM2.5@358.632,109.244 359.259,109.244 359.537,108.966 v1(359.537,108.077)
  Bottom Layer w0.254: v1@359.537,108.204 359.537,109.982 359.89,110.335 U5.21@359.89,112.764
DM: U5.44 USB_L2.3 | length 14.5
  Top Layer w0.254: USB_L2.3@356.076,129.54 v1(356.076,129.635)
  Mid-Layer 1 w0.254: v1(354.33,119.761) 356.616,122.047 356.616,128.714 356.616,129.095 v1(356.076,129.635) ; v1@354.33,119.951 ccw(c354.33,120.411) 354.655,120.086 ccw(c354.98,119.761) v1@354.52,119.761 ; v1@356.076,129.445 cw(c356.076,128.985) 356.401,129.31 cw(c356.726,129.635) v1@356.267,129.635
  Bottom Layer w0.254: U5.44@352.54,120.114 353.977,120.114 v1(354.33,119.761)
DP: U5.45 USB_L2.2 | length 11.6
  Mid-Layer 1 w0.254: v1(354.33,120.777) 354.711,121.158 354.711,126.238 355.092,126.619 v1(355.092,129.667) ; v1@354.957,129.532 cw(c354.632,129.207) 355.092,129.207 cw(c355.552,129.207) v1@355.227,129.532
  Bottom Layer w0.254: U5.45@352.54,120.614 v1@354.167,120.614
EN_POWER: U5.25